# Altium PCB 0030.PcbDoc
Units mm, origin at the board's own origin, x right, y up, seen from the top; angles counter-clockwise.
Board outline 152.4 x 101.6 mm, 2 copper layers (Top Layer, Bottom Layer); 10 components, 7 nets, 28 pads, 20 vias.
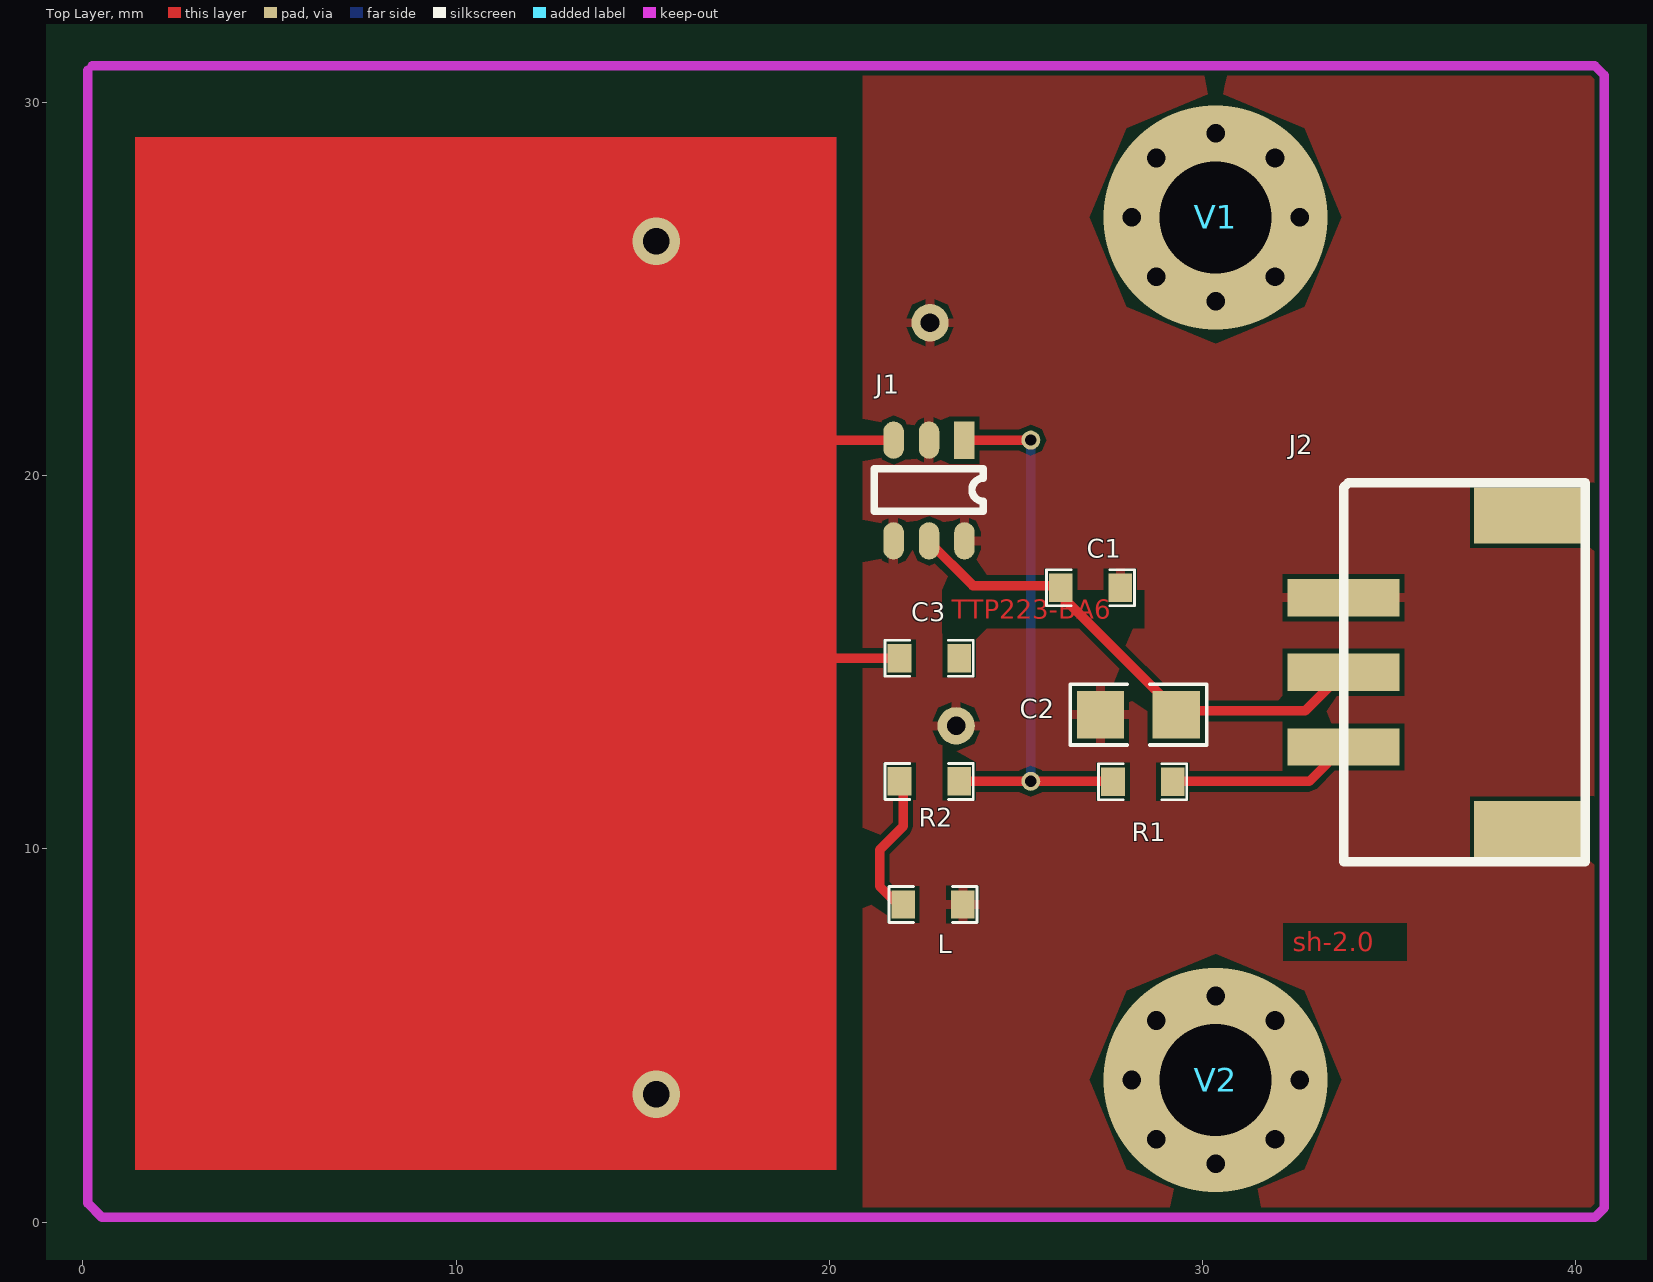
[diagram p0: Top Layer view]
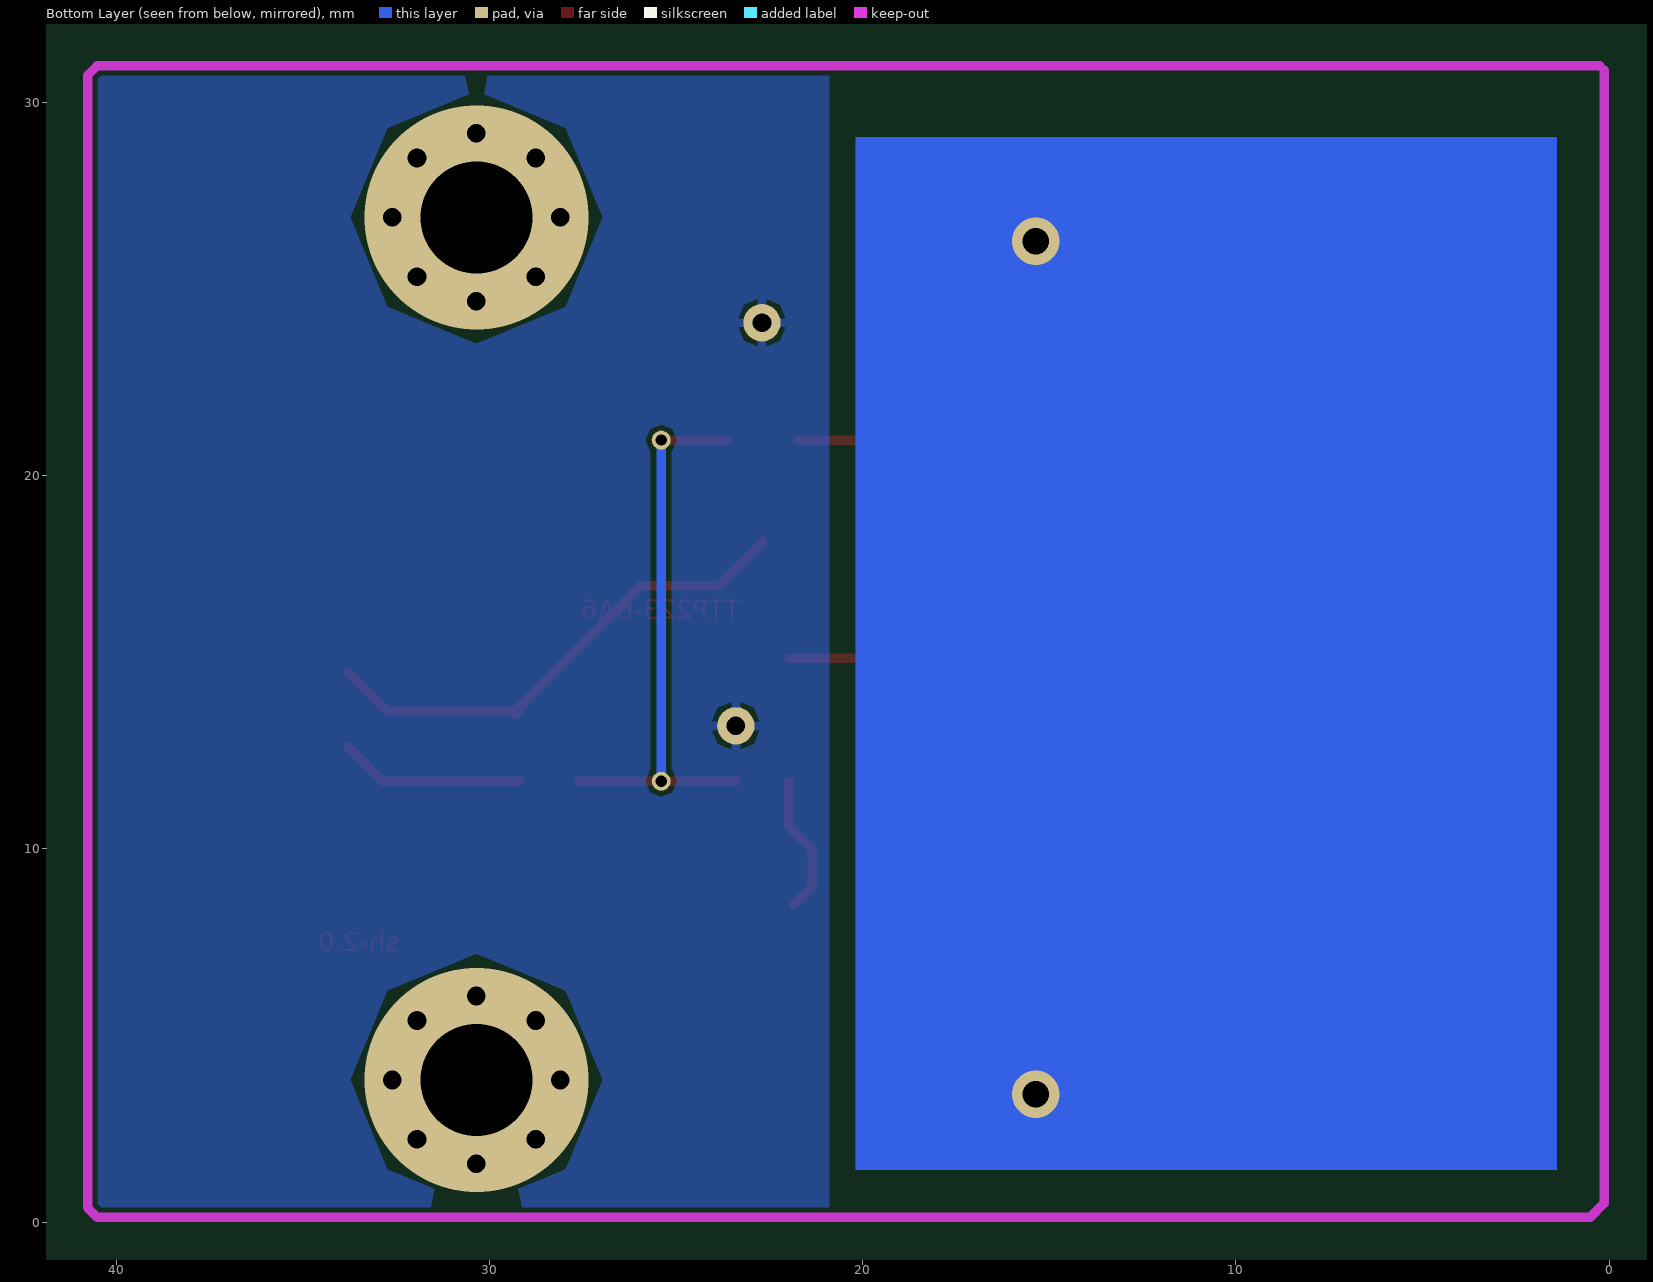
[diagram p1: Bottom Layer view, seen from below]

## Layer stack, top to bottom
Top Layer: signal copper 0.0356
Dielectric: dielectric 0.32, FR-4, Dk 4.8
Bottom Layer: signal copper 0.0356

## Board outline
-50.419,-37.846 101.981,-37.846 101.981,63.754 -50.419,63.754

## Design rules (kind name [scope] priority, off if disabled: settings)
Clearance [All] p1: gap=0.127
PolygonConnect [All] p1: connectstyle=Relief reliefconductorwidth=0.254 reliefentries=4 polygonreliefangle="90 Angle"
RoutingVias [All] p1: holewidth=0.711 width=1.27 viastyle="Through Hole" minholewidth=0.711 minwidth=1.27 maxholewidth=0.711 maxwidth=1.27
SilkscreenOverComponentPads [All] p1: minsilkscreentomaskgap=0.254
SolderMaskExpansion [All] p1: expansion=0.102
Width [All] p1: maxlimit=0.254 minlimit=0.254 preferedwidth=0.254
27 further rules are at their usual default settings.

## Classes and differential pairs
component class 0030: C2 J1 J2 R1 V1 V2

## Components (designator, comment, footprint, x,y, rotation, side; value= is the part's Value field where it differs from the comment)
C1 "1K" 0603E 26.3,17 r0 top
C2 "4.7u" 0805 29.3,13.6 r180 top
C3 "30p" 0603E 21.979,15.111 r0 top
J1 "TTP223-BA6" SOT-23-6 23.622,20.955 r270 top
J2 "sh-2.0" sh-2.0 33.782,14.732 r90 top
L "0" 0603E 22.079,8.511 r0 top
R1 "470" 0603E 27.7,11.8 r0 top
R2 "1K" 0603E 21.979,11.811 r0 top
V1 "Via" Via 30.353,26.924 r0 top
V2 "Via" Via 30.353,3.81 r0 top

## Footprints (in the part's own frame and the unit in brackets; to place one, negate y for a bottom-side part, rotate by r counter-clockwise, add the part's x,y. Pads: shape width x height; smd on the part's side, far side on the other; paste and mask are expansions set on the pad)
0603E [mm]
  rect 0.635x0.762 smd: 1(-0.1,0) 2(1.5,0)
  silkscreen extent -0.48,-0.48 1.88,0.48
0805 [mil]
  rect 50x50 smd: 1(0,0) 2(80,0)
  silkscreen extent -32,-32 112,32
sh-2.0 [mm]
  rect 1x3 smd: 1(-2,0) 2(0,0) 3(2,0) 3(2,0)
  rect 1.5x3 smd: GND(-4.2,-5) GND(4.2,-5)
  silkscreen extent -5.08,-6.48 5.08,0
SOT-23-6 [mm]
  rect 1x0.55 smd: 1(0,0)
  oval 1x0.55 smd: 2(0,-0.95) 3(0,-1.9) 4(2.7,-1.9) 5(2.7,-0.95) 6(2.7,0)
  silkscreen extent 0.76,-2.41 1.91,0.51
Via [mm]

## Part data
C2: library part cap0603

## Free pads (board coordinates)
  round 1 hole 0.5: 1(22.7,24.1) 1(23.4,13.3)
  round 0.508 hole 0.3: 2(25.4,11.811) 2(25.4,20.955)

## Via types
v1: diameter 1, hole 0.5, Top Layer to Bottom Layer, 16 vias
v2: diameter 6, hole 3, Top Layer to Bottom Layer, 2 vias
v3: diameter 1.27, hole 0.711, Top Layer to Bottom Layer, 2 vias

## Nets (pads, with @x,y where several pads share a name; then routed paths per layer and width w, separated by ;. In a path a pad name is that pad's centre, name@x,y a point inside that pad or via, vN(x,y) a via of type N, cw(c..) or ccw(c..) an arc to the next point about the centre after c; other vN are vias at no path point)
GND: C1.2 C2.2 J1.2 J1.4 J1.6 J2.3 L.2 pad.1
Net*_chumo: C3.1 J1.3 | length 9.4
  Top Layer w0.254: 16.002,20.955 J1.3 ; 18.288,15.113 C3.1@21.979,15.113
  other v3: 15.367,3.429 15.367,26.289
NetC1_1: 
NetJ1_1: J1.1 pad.2 R1.1 R2.2 | length 15.1
  Top Layer w0.254: R2.2@23.4,11.811 25.4,11.811 R1.1@27.6,11.811 ; J1.1 pad.2@25.4,20.955
  Bottom Layer w0.254: pad.2@25.4,11.811 pad.2@25.4,20.955
NetJ2_3: J2.1 R1.2 | length 5
  Top Layer w0.254: R1.2@29.2,11.811 32.861,11.811 J2.1
NetL_2: L.1 R2.1 | length 3.8
  Top Layer w0.254: L.1@21.84,8.509 21.349,9.001 21.349,9.973 21.979,10.603 R2.1@21.979,11.811
VCC: C1.1 C2.1 J1.5 J2.2 | length 13.6
  Top Layer w0.254: J1.5 22.672,18.232 23.848,17.056 25.943,17.056 C2.1@29.3,13.699 ; C2.1@29.201,13.699 C2.1@29.3,13.699 ; C2.1 C2.1@29.3,13.699 ; J2.2 32.749,13.699 C2.1@29.3,13.699
pads on no net: C3.2 J2.GND
copper on no net:
  other v1: 30.353,1.56 28.762,2.219 31.944,2.219 28.103,3.81 32.603,3.81 28.762,5.401 31.944,5.401 30.353,6.06 30.353,24.674 28.762,25.333 31.944,25.333 28.103,26.924 32.603,26.924 28.762,28.515 31.944,28.515 30.353,29.174
  other v2: 30.353,3.81 30.353,26.924

## Polygon pours and split planes (outlines as drawn)
GND on Bottom Layer "Top Layer-No Net" (solid, pour order 6): 20.9,31 20.9,0.127 40.513,0.127 40.513,0.346 40.767,0.6 40.767,30.734 40.513,30.988
GND on Top Layer "Top Layer-No Net" (solid, pour order 8): 20.9,30.988 20.9,0.1 20.927,0.127 40.513,0.127 40.513,0.313 40.8,0.6 40.8,31

## Keep-outs
Keep-Out Layer:
  lines w0.254: 0.127,30.861 0.127,30.734 0.127,0.508 0.508,0.127 40.513,0.127 40.767,0.381 40.767,30.734 40.513,30.988 0.381,30.988 0.254,30.988

## Other copper
Top Layer:
  rectangle net Net*_chumo: 1.397,1.397 20.193,29.083
Bottom Layer:
  rectangle net Net*_chumo: 1.397,1.397 20.193,29.083

## Silkscreen, mask and mechanical layers (free items; w line width, h text height)
Top Solder:
  rectangle: 3.302,3.175 18.669,26.797
  text "Touch" at 37.719,2.413 h0.76 r90
  text "Sensor V2" at 39.116,1.397 h0.76 r90
Bottom Solder:
  rectangle: 4.064,2.921 17.399,27.178